# Altium PCB 外置探头.PcbDoc
Units mm, origin at the board's own origin, x right, y up, seen from the top; angles counter-clockwise.
Board outline 152.4 x 101.6 mm, 2 copper layers (Top Layer, Bottom Layer); 1 components, 4 nets, 9 pads, 2 vias.
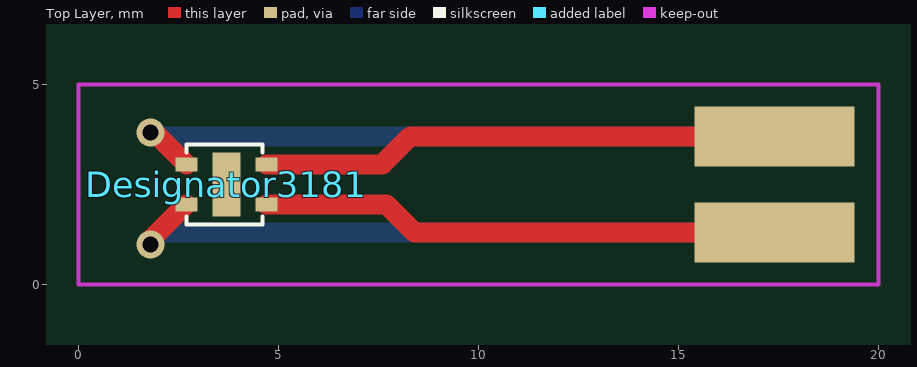
[diagram p0: Top Layer view]
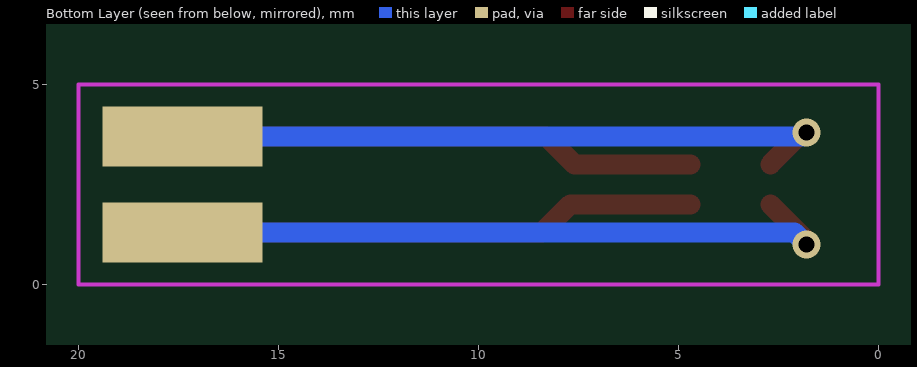
[diagram p1: Bottom Layer view, seen from below]

## Layer stack, top to bottom
Top Layer: signal copper 0.0356
Dielectric: dielectric 0.32, FR-4, Dk 4.8
Bottom Layer: signal copper 0.0356

## Board outline
-8.2,-48.7 144.2,-48.7 144.2,52.9 -8.2,52.9

## Design rules (kind name [scope] priority, off if disabled: settings)
Clearance [All] p1: gap=0.254
PolygonConnect [All] p1: connectstyle=Relief reliefconductorwidth=0.254 reliefentries=4 polygonreliefangle="90 Angle"
RoutingVias [All] p1: holewidth=0.711 width=1.27 viastyle="Through Hole" minholewidth=0.4 minwidth=0.7 maxholewidth=0.711 maxwidth=1.27
SilkscreenOverComponentPads [All] p1: minsilkscreentomaskgap=0.254
SolderMaskExpansion [All] p1: expansion=0.102
Width [All] p1: maxlimit=0.5 minlimit=0.254 preferedwidth=0.254
27 further rules are at their usual default settings.

## Components (designator, comment, footprint, x,y, rotation, side; value= is the part's Value field where it differs from the comment)
Designator3181 "Comment" 0 4.6,3.5 r180 top

## Footprints (in the part's own frame and the unit in brackets; to place one, negate y for a bottom-side part, rotate by r counter-clockwise, add the part's x,y. Pads: shape width x height; smd on the part's side, far side on the other; paste and mask are expansions set on the pad)
0 [mm]
  rect 0.55x0.35 smd: 3(-0.1,1.5) 3(-0.1,0.5) 3(1.9,0.5) 3(1.9,1.5)
  rect 0.7x1.6 smd: 3(0.9,1)
  silkscreen extent 0,0 1.9,2

## Free pads (board coordinates)
  rect 4x1.5 smd: 4(17.4,1.3) 4(17.4,3.7)
  rect 4x1.5 smd far side: 4(17.4,1.3) 4(17.4,3.7)

## Via types
v1: diameter 0.7, hole 0.4, Top Layer to Bottom Layer, 2 vias

## Nets (pads, with @x,y where several pads share a name; then routed paths per layer and width w, separated by ;. In a path a pad name is that pad's centre, name@x,y a point inside that pad or via, vN(x,y) a via of type N, cw(c..) or ccw(c..) an arc to the next point about the centre after c; other vN are vias at no path point)
1: Designator3181.3@4.7,3 pad.4@17.4,3.7 | length 13
  Top Layer w0.5: Designator3181.3@4.7,3 7.6,3 8.3,3.7 pad.4@17.4,3.7
2: Designator3181.3@4.7,2 pad.4@17.4,1.3 | length 13
  Top Layer w0.5: Designator3181.3@4.7,2 7.7,2 8.4,1.3 pad.4@17.4,1.3
3: Designator3181.3@2.7,3 pad.4@17.4,3.7 | length 16.9
  Top Layer w0.5: v1(1.8,3.8) 1.9,3.8 Designator3181.3@2.7,3
  Bottom Layer w0.5: v1(1.8,3.8) 1.9,3.7 pad.4@17.4,3.7
4: Designator3181.3@2.7,2 pad.4@17.4,1.3 | length 17.1
  Top Layer w0.5: v1(1.8,1) 1.8,1.1 Designator3181.3@2.7,2
  Bottom Layer w0.5: v1(1.8,1) 2.1,1.3 pad.4@17.4,1.3
pads on no net: Designator3181.3@3.7,2.5

## Keep-outs
Keep-Out Layer:
  lines w0.1: 0,0 20,0 20,5 0,5 0,0